# EAGLE board ESP32_v1.1_PCB (EAGLE 9.7.0)
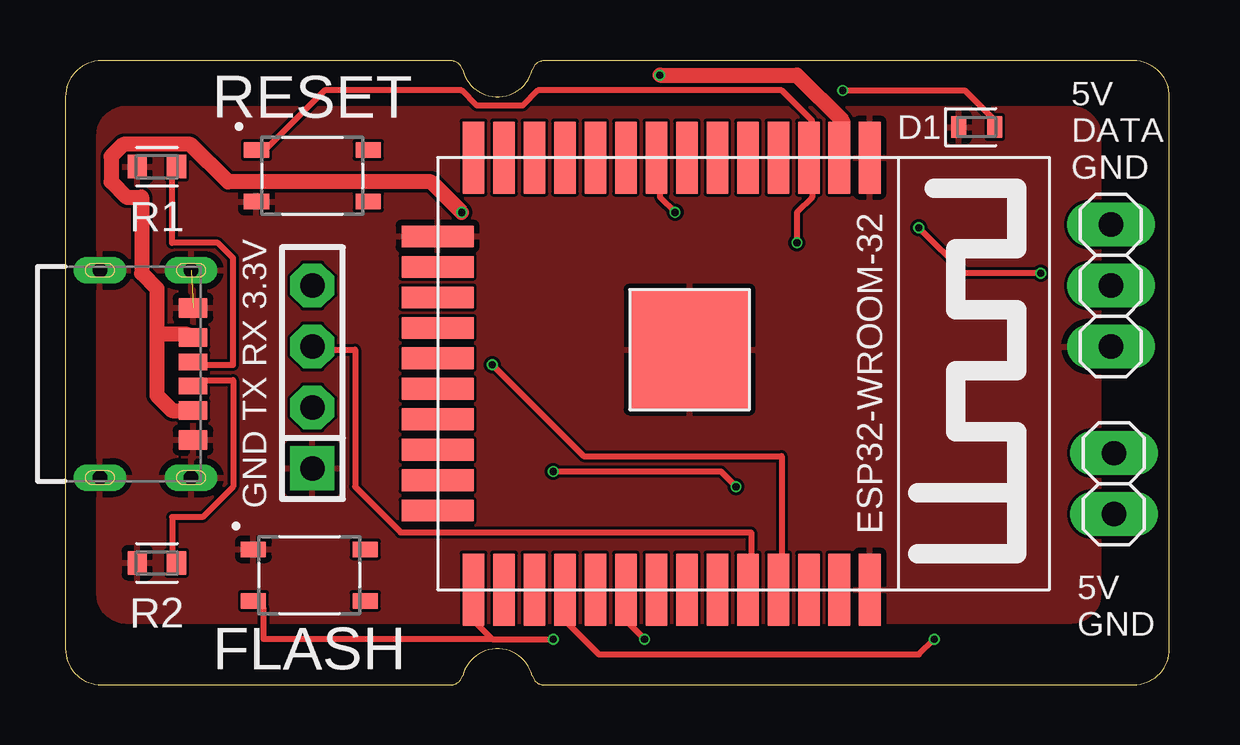
[diagram p0: board, top side]
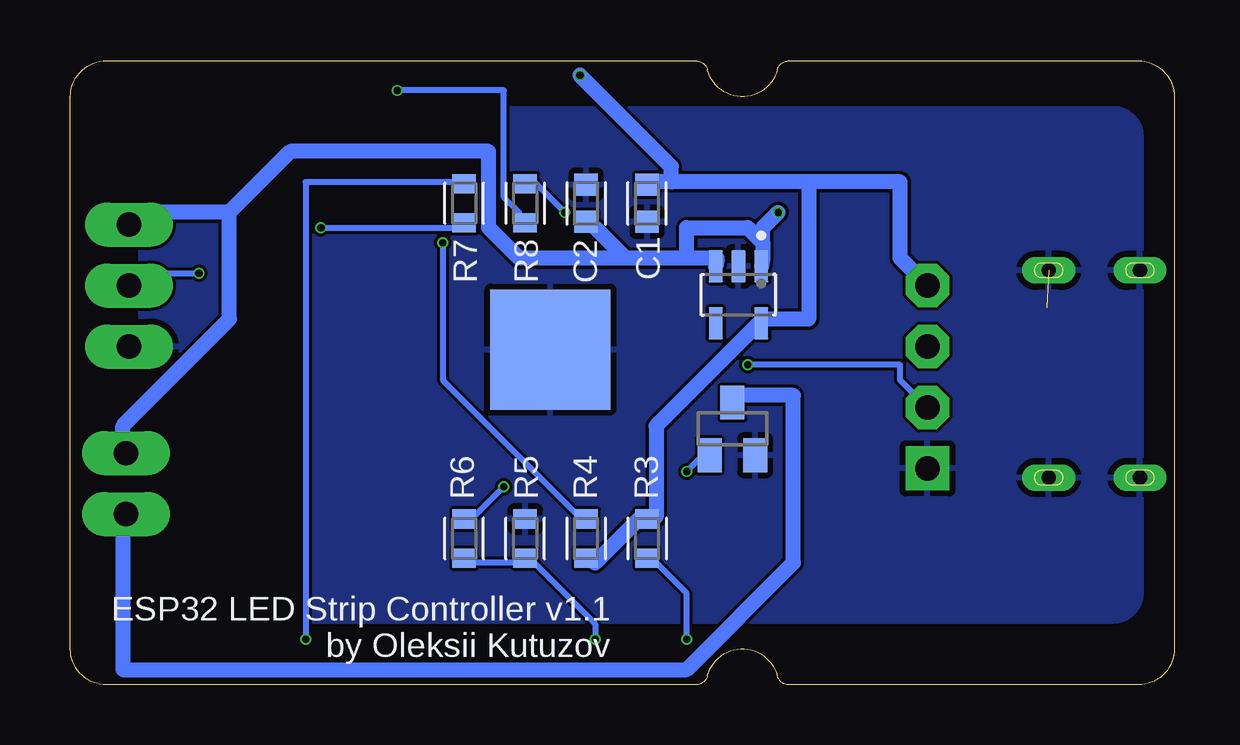
[diagram p1: board, bottom side, seen from below]

Size 46 x 26 mm. Coordinates in mm from the lower left corner, seen from the top.
Outline: 4.63,17.27 4.64,17.3 4.64,17.33 4.64,17.35 4.65,17.38 4.66,17.4 4.67,17.42 4.69,17.45 4.71,17.47 4.72,17.49 4.74,17.5 4.76,17.52 4.79,17.53 4.81,17.55 4.83,17.56 4.86,17.56 4.88,17.57 4.91,17.57 4.93,17.57 5.54,17.57 5.56,17.57 5.59,17.57 5.61,17.56 5.64,17.56 5.66,17.55 5.68,17.53 5.71,17.52 5.73,17.5 5.75,17.49 5.76,17.47 5.78,17.45 5.79,17.42 5.81,17.4 5.82,17.38 5.83,17.35 5.83,17.33 5.83,17.3 5.83,17.27 5.83,17.25 5.83,17.22 5.83,17.2 5.82,17.17 5.81,17.15 5.79,17.12 5.78,17.1 5.76,17.08 5.75,17.06 5.73,17.04 5.71,17.03 5.68,17.01 5.66,17 5.64,16.99 5.61,16.98 5.59,16.98 5.56,16.98 5.54,16.97 4.93,16.97 4.91,16.98 4.88,16.98 4.86,16.98 4.83,16.99 4.81,17 4.79,17.01 4.76,17.03 4.74,17.04 4.72,17.06 4.71,17.08 4.69,17.1 4.67,17.12 4.66,17.15 4.65,17.17 4.64,17.2 4.64,17.22 4.64,17.25 4.63,17.27
Outline: 4.63,8.63 4.64,8.66 4.64,8.69 4.64,8.71 4.65,8.74 4.66,8.76 4.67,8.78 4.69,8.81 4.71,8.83 4.72,8.85 4.74,8.86 4.76,8.88 4.79,8.89 4.81,8.91 4.83,8.92 4.86,8.92 4.88,8.93 4.91,8.93 4.93,8.93 5.54,8.93 5.56,8.93 5.59,8.93 5.61,8.92 5.64,8.92 5.66,8.91 5.68,8.89 5.71,8.88 5.73,8.86 5.75,8.85 5.76,8.83 5.78,8.81 5.79,8.78 5.81,8.76 5.82,8.74 5.83,8.71 5.83,8.69 5.83,8.66 5.83,8.63 5.83,8.61 5.83,8.58 5.83,8.56 5.82,8.53 5.81,8.51 5.79,8.48 5.78,8.46 5.76,8.44 5.75,8.42 5.73,8.4 5.71,8.39 5.68,8.37 5.66,8.36 5.64,8.35 5.61,8.34 5.59,8.34 5.56,8.34 5.54,8.33 4.93,8.33 4.91,8.34 4.88,8.34 4.86,8.34 4.83,8.35 4.81,8.36 4.79,8.37 4.76,8.39 4.74,8.4 4.72,8.42 4.71,8.44 4.69,8.46 4.67,8.48 4.66,8.51 4.65,8.53 4.64,8.56 4.64,8.58 4.64,8.61 4.63,8.63
Outline: 0.83,17.27 0.84,17.3 0.84,17.33 0.84,17.35 0.85,17.38 0.86,17.4 0.88,17.42 0.89,17.45 0.91,17.47 0.92,17.49 0.94,17.5 0.96,17.52 0.98,17.53 1.01,17.55 1.03,17.56 1.06,17.56 1.08,17.57 1.11,17.57 1.14,17.57 1.74,17.57 1.76,17.57 1.79,17.57 1.81,17.56 1.84,17.56 1.86,17.55 1.89,17.53 1.91,17.52 1.93,17.5 1.95,17.49 1.97,17.47 1.98,17.45 2,17.42 2.01,17.4 2.02,17.38 2.02,17.35 2.03,17.33 2.03,17.3 2.04,17.27 2.03,17.25 2.03,17.22 2.02,17.2 2.02,17.17 2.01,17.15 2,17.12 1.98,17.1 1.97,17.08 1.95,17.06 1.93,17.04 1.91,17.03 1.89,17.01 1.86,17 1.84,16.99 1.81,16.98 1.79,16.98 1.76,16.98 1.74,16.97 1.14,16.97 1.11,16.98 1.08,16.98 1.06,16.98 1.03,16.99 1.01,17 0.98,17.01 0.96,17.03 0.94,17.04 0.92,17.06 0.91,17.08 0.89,17.1 0.88,17.12 0.86,17.15 0.85,17.17 0.84,17.2 0.84,17.22 0.84,17.25 0.83,17.27
Outline: 0.83,8.63 0.84,8.66 0.84,8.69 0.84,8.71 0.85,8.74 0.86,8.76 0.88,8.78 0.89,8.81 0.91,8.83 0.92,8.85 0.94,8.86 0.96,8.88 0.98,8.89 1.01,8.91 1.03,8.92 1.06,8.92 1.08,8.93 1.11,8.93 1.14,8.93 1.74,8.93 1.76,8.93 1.79,8.93 1.81,8.92 1.84,8.92 1.86,8.91 1.89,8.89 1.91,8.88 1.93,8.86 1.95,8.85 1.97,8.83 1.98,8.81 2,8.78 2.01,8.76 2.02,8.74 2.02,8.71 2.03,8.69 2.03,8.66 2.04,8.63 2.03,8.61 2.03,8.58 2.02,8.56 2.02,8.53 2.01,8.51 2,8.48 1.98,8.46 1.97,8.44 1.95,8.42 1.93,8.4 1.91,8.39 1.89,8.37 1.86,8.36 1.84,8.35 1.81,8.34 1.79,8.34 1.76,8.34 1.74,8.33 1.14,8.33 1.11,8.34 1.08,8.34 1.06,8.34 1.03,8.35 1.01,8.36 0.98,8.37 0.96,8.39 0.94,8.4 0.92,8.42 0.91,8.44 0.89,8.46 0.88,8.48 0.86,8.51 0.85,8.53 0.84,8.56 0.84,8.58 0.84,8.61 0.83,8.63
Outline: 16.55,25.62 arc76 16.06,26 1.5,26 arc90 0,24.5 0,1.5 arc90 1.5,0 16.06,0 arc76 16.55,0.38 arc-151 19.45,0.38 arc76 19.94,0 44.5,0 arc90 46,1.5 46,24.5 arc90 44.5,26 19.94,26 arc76 19.45,25.62 arc-151 16.55,25.62
Copper layers (1*16): Top 0.035mm / dielectric 1.6mm / Bottom 0.035mm
Design rules "jlcpcb-2layers": minimum track width 5mil, minimum drill 0.3mm, track to track 5mil, track to pad 5mil, pad to pad 5mil, via to via 5mil, smd to smd 5mil, copper to edge 0.2mm, drill to drill 6mil, minimum pad ring 10mil, minimum via ring 3mil, stop-mask expansion 4mil, vias tented up to drill 0mil, thermal gap 10mil
Net classes: 0 default: width 0.254 mm; 1 5V: width 0.635 mm; 2 GND: width 0.635 mm

## Footprints (pad centres in the part's own frame; a part is rotated, then mirrored left to right if it is on the bottom)
CAPC1608X85 = smd 0.921 x 0.97: 1 -0.775,0; 2 0.775,0
LEDC1608X80N_FLAT-R = smd 0.612 x 0.912: A 0.75,0; C -0.75,0
GCT_USB4125-GF-A_REVA = smd 0.7 x 1.2: A5 -0.5,0.08; B5 0.5,0.08 | smd 0.76 x 1.2: A9 1.52,0.08; B9 -1.52,0.08 | smd 0.8 x 1.2: A12 2.75,0.08; B12 -2.75,0.08 | drill 0.6 pad 1.1 long: S1 -4.32,0; S2 4.32,0; S3 -4.32,-3.8; S4 4.32,-3.8
SIP-100-04-40 = drill 1.016 pad 1.778 square: 1 -3.81,0 | drill 1.016 pad 1.778 octagon: 2 -1.27,0; 3 1.27,0; 4 3.81,0
1X02 = drill 1.016 long: 1 -1.27,0; 2 1.27,0
1X03 = drill 1.016 long: 1 -2.54,0; 2 0,0; 3 2.54,0
SOT23 = smd 1 x 1.4: 1 -0.95,-1.1; 2 0.95,-1.1; 3 0,1.1
RESC1608X60 = smd 0.799 x 0.974: 1 -0.815,0; 2 0.815,0
SW_SKRPACE010 = smd 1.05 x 0.65: 1 -2.329,1.075; 2 2.329,1.075; 3 -2.329,-1.075; 4 2.329,-1.075
SOT95P285X140-5N = smd 1.35 x 0.6: 1 -1.185,0.95; 2 -1.185,0; 3 -1.185,-0.95; 4 1.185,-0.95; 5 1.185,0.95
ESP32-WROOM = smd 3 x 0.9: 3V3 0,16.74; EN 0,15.47; GND1 0,18.01; GND3 18,18.01; IO0 18,1.5; IO4 18,2.77; IO5 18,6.58; IO12 0,1.5; IO14 0,2.77; IO16 18,4.04; IO17 18,5.31; IO18 18,7.85; IO19 18,9.12; IO21 18,11.66; IO22 18,15.47; IO23 18,16.74; IO25 0,6.58; IO26 0,5.31; IO27 0,4.04; IO32 0,9.12; IO33 0,7.85; IO34 0,11.66; IO35 0,10.39; NC 18,10.39; RX 18,12.93; SENSOR_VN 0,12.93; SENSOR_VP 0,14.2; TX 18,14.2 | smd 0.9 x 3: CLK 9.635,0; CMD 8.365,0; GND2 3.285,0; IO2 14.715,0; IO13 4.555,0; IO15 13.445,0; SD0 10.905,0; SD1 12.175,0; SD2 5.825,0; SD3 7.095,0 | smd 5 x 5: GND4 8,10.5 | smd 5 x 5 bottom: GND5 8,10.5

## Placement (x,y rotation side)
C1  10uF  [CAPC1608X85]  21.97,20.07 270 bottom
C2  10uF  [CAPC1608X85]  24.51,20.07 90 bottom
D1  LED  [LEDC1608X80N_FLAT-R]  37.97,23.24 0 top
J1  USB4125-GF-A_REVA  [GCT_USB4125-GF-A_REVA]  5.24,12.95 270 top
J2  F-1X04-SIP-100-40  [SIP-100-04-40]  10.29,12.83 90 top
J3  PINHD-1X2  [1X02]  43.69,8.38 90 top
LED1  PINHD-1X3  [1X03]  43.56,16.64 90 top
Q1  NMOSFET  [SOT23]  18.41,10.67 0 bottom
R1  5.1k  [RESC1608X60]  3.81,21.59 180 top
R2  5.1k  [RESC1608X60]  3.81,5.08 180 top
R3  4.7K  [RESC1608X60]  21.97,6.1 90 bottom
R4  4.7K  [RESC1608X60]  24.51,6.1 90 bottom
R5  10k  [RESC1608X60]  27.05,6.1 270 bottom
R6  1k  [RESC1608X60]  29.59,6.1 270 bottom
R7  300-500 ohm  [RESC1608X60]  29.59,20.07 270 bottom
R8  430  [RESC1608X60]  27.05,20.07 90 bottom
S1  SKRPACE010  [SW_SKRPACE010]  10.16,4.57 0 top
S2  SKRPACE010  [SW_SKRPACE010]  10.29,21.21 0 top
U1  AP2112K-3.3TRG1  [SOT95P285X140-5N]  18.16,16.26 270 bottom
U2  ESP32-WROOM  [ESP32-WROOM]  15.5,21.97 270 top

## Library data of the parts
C1 C2 = Capacitor; CATEGORY: Capacitor
D1 = LED; CATEGORY: LED; COLOR: RED; DESCRIPTION: CHIP LED FLAT; SUB-CATEGORY: CHIP; TYPE: FLAT_TOP
J1 = USB4125-GF-A_REVA model; AVAILABILITY: Warning; DESCRIPTION: USB Charge Only Connector Type C Horizontal Receptacle, 3.16mm profile, 6 Pins, Surface mount, Top mount, low cost; MF: Global Connector Technology; MP: USB4125-GF-A; PACKAGE: None; PRICE: None; PURCHASE-URL: https://pricing.snapeda.com/search/part/USB4125-GF-A/?ref=eda
J2 = con-headers-jp
J3 LED1 = Connector; CATEGORY: CONNECTOR; SUB-CATEGORY: PIN-HEADER
Q1 = Transistor; CATEGORY: Transistor; SUB-CATEGORY: MOSFET; TYPE: N-Channel
R1-R8 = Resistor; CATEGORY: Resistor; SUB-CATEGORY: Fixed
S1 S2 = SKRPACE010; MANUFACTURER: ALPS; STANDARD: Maniufacturer Recommendations
U1 = AP2112K-3.3TRG1; MANUFACTURER: Diodes Inc.; PARTREV: 2-2
U2 = ESP32

## Nets
+3.3V [5V]: C1.1 J2.4 R3.2 R4.1 U1.5 U2.3V3
+5V [5V]: C2.1 J1.A9 J1.B9 J3.2 LED1.3 U1.1 U1.3
CC: J1.A5 R1.1
D [GND]: J3.1 Q1.3
DATA: LED1.2 R7.2
EN: R4.2 S2.1 U2.EN
ESP_RX: J2.3 U2.RX
ESP_TX: J2.2 U2.TX
G: Q1.1 R6.1
GND [GND]: C1.2 C2.2 D1.C J1.A12 J1.B12 J1.S1 J1.S2 J1.S3 J1.S4 J2.1 LED1.1 Q1.2 R1.2 R2.2 R5.1 S1.1 S2.3 U1.2 U2.GND1 U2.GND2 U2.GND3 U2.GND4 U2.GND5
GPIO0: R3.1 S1.3 U2.IO0
GPIO17: R7.1 U2.IO17
GPIO18: R5.2 R6.2 U2.IO18
GPIO32: R8.2 U2.IO32
LED: D1.A R8.1
N$1: J1.B5 R2.1

## Tracks (layer width: path | path; a pad name or v marks a point on that pad's centre or on a via)
+3.3V  (via drill 0.3)
  Top 0.635: v24.77,25.4 30.48,25.4 32.38,23.5 32.38,22.23 U2.3V3
  Bottom 0.635: R4.1 24.13,5.08 22.23,6.99 R3.2 21.59,6.99 21.59,10.79 17.14,15.24 | 15.24,20.95 11.43,20.95 11.43,17.78 J2.4 | 15.24,20.95 20.95,20.95 | 20.95,20.95 21.59,20.95 C1.1 | 17.14,15.24 15.24,15.24 15.24,20.95 | 17.14,15.24 U1.5 | v24.77,25.4 20.95,21.59 20.95,20.95
+5V  (via drill 0.3)
  Top 0.635: 3.81,14.61 3.81,12.06 4.45,11.43 5.08,11.43 J1.A9 | 3.81,14.61 5.08,14.61 J1.B9 | 3.81,14.61 3.81,16.51 3.17,17.14 3.17,20.32 2.54,20.32 1.91,20.95 1.91,22.02 2.41,22.52 5.21,22.52 6.78,20.95 15.24,20.95 v16.51,19.68
  Bottom 0.635: 39.37,19.68 43.18,19.68 LED1.3 | 39.37,19.68 39.37,15.24 43.81,10.79 43.81,10.16 J3.2 | 22.86,17.78 24.13,19.05 C2.1 | 20.32,17.78 19.05,17.78 U1.3 | 20.32,17.78 22.86,17.78 | 17.14,18.41 17.14,17.78 U1.1 | 17.14,18.41 17.78,19.05 20.32,19.05 20.32,17.78 | v16.51,19.68 17.14,19.05 17.14,18.41 | 39.37,19.68 36.83,22.23 28.57,22.23 28.57,19.05 27.3,17.78 22.86,17.78
CC
  Top 0.254: R1.1 4.45,21.59 4.45,18.41 6.35,18.41 6.99,17.78 6.99,13.34 5.71,13.34 J1.A5
D
  Bottom 0.635: Q1.3 18.41,12.06 15.88,12.06 15.88,5.08 20.32,0.64 43.81,0.64 43.81,6.99 J3.1
DATA  (via drill 0.3)
  Top 0.254: v35.56,19.05 37.47,17.14 v40.64,17.14
  Bottom 0.254: v35.56,19.05 29.84,19.05 R7.2 | v40.64,17.14 43.18,17.14 LED1.2
EN  (via drill 0.3)
  Top 0.254: v30.48,18.41 30.48,19.68 31.11,20.32 31.11,21.59 U2.EN 31.11,22.23 31.11,23.5 29.84,24.77 19.68,24.77 19.05,24.13 17.14,24.13 16.51,24.77 10.79,24.77 8.26,22.23 S2.1
  Bottom 0.254: v30.48,18.41 30.48,12.7 24.77,6.99 R4.2
ESP_RX
  Top 0.254: U2.RX 28.57,4.45 28.57,6.35 13.97,6.35 12.06,8.26 12.06,13.97 10.79,13.97 J2.3
ESP_TX  (via drill 0.3)
  Top 0.254: v17.78,13.34 21.59,9.53 29.84,9.53 29.84,4.45 U2.TX
  Bottom 0.254: v17.78,13.34 11.43,13.34 11.43,12.7 J2.2
G  (via drill 0.3)
  Top 0.254: v27.94,8.26 27.3,8.89 v20.32,8.89
  Bottom 0.254: v27.94,8.26 29.21,6.99 R6.1 | v20.32,8.89 19.68,9.53 Q1.1
GND  (1 unrouted)
  pour Bottom: 2.54,2.62 41.91,2.62 42.12,2.63 42.32,2.69 42.51,2.78 42.68,2.9 42.82,3.04 42.94,3.21 43.03,3.4 43.09,3.6 43.1,3.81 43.1,22.86 43.09,23.07 43.03,23.27 42.94,23.46 42.82,23.63 42.68,23.77 42.51,23.89 42.32,23.98 42.12,24.04 41.91,24.05 2.54,24.05 2.33,24.04 2.13,23.98 1.94,23.89 1.77,23.77 1.63,23.63 1.51,23.46 1.42,23.27 1.36,23.07 1.35,22.86 1.35,3.81 1.36,3.6 1.42,3.4 1.51,3.21 1.63,3.04 1.77,2.9 1.94,2.78 2.13,2.69 2.33,2.63
  pour Top: 2.54,2.62 41.91,2.62 42.12,2.63 42.32,2.69 42.51,2.78 42.68,2.9 42.82,3.04 42.94,3.21 43.03,3.4 43.09,3.6 43.1,3.81 43.1,22.86 43.09,23.07 43.03,23.27 42.94,23.46 42.82,23.63 42.68,23.77 42.51,23.89 42.32,23.98 42.12,24.04 41.91,24.05 2.54,24.05 2.33,24.04 2.13,23.98 1.94,23.89 1.77,23.77 1.63,23.63 1.51,23.46 1.42,23.27 1.36,23.07 1.35,22.86 1.35,3.81 1.36,3.6 1.42,3.4 1.51,3.21 1.63,3.04 1.77,2.9 1.94,2.78 2.13,2.69 2.33,2.63
GPIO0  (via drill 0.3)
  Top 0.254: 17.78,1.91 v20.32,1.91 | 17.78,1.91 17.14,2.54 17.14,3.81 U2.IO0 | 17.78,1.91 8.26,1.91 8.26,3.17 S1.3
  Bottom 0.254: v20.32,1.91 20.32,3.81 21.59,5.08 R3.1
GPIO17  (via drill 0.3)
  Top 0.254: v36.2,1.91 35.56,1.27 22.23,1.27 20.95,2.54 20.95,3.81 U2.IO17
  Bottom 0.254: v36.2,1.91 36.2,20.95 29.84,20.95 R7.1
GPIO18  (via drill 0.3)
  Top 0.254: v24.13,1.91 23.5,2.54 23.5,3.81 U2.IO18
  Bottom 0.254: R6.2 29.21,5.08 27.3,5.08 R5.2 26.67,5.08 24.13,2.54 v24.13,1.91
GPIO32  (via drill 0.3)
  Top 0.254: v25.4,19.68 24.77,20.32 24.77,21.59 U2.IO32
  Bottom 0.254: v25.4,19.68 26.67,20.95 R8.2
LED  (via drill 0.3)
  Top 0.254: v32.38,24.77 37.47,24.77 38.73,23.5 D1.A
  Bottom 0.254: v32.38,24.77 27.94,24.77 27.94,20.32 27.3,19.68 27.3,19.05 R8.1
N$1
  Top 0.254: R2.1 4.45,5.08 4.45,6.99 5.71,6.99 6.99,8.26 6.99,12.7 5.71,12.7 J1.B5
(copper drawn outside any net)
  shapes: Top area x1

## Text on the board
tNames: RESET | 5V / DATA / GND | GND TX RX 3.3V | 5V / GND | FLASH
bNames: ESP32 LED Strip Controller v1.1 / by Oleksii Kutuzov